# Altium PCB Pump_Agri.PcbDoc (part 1 of 2)
Units mm, origin at the board's own origin, x right, y up, seen from the top; angles counter-clockwise.
Board outline 92.13 x 124.56 mm, 2 copper layers (Top Layer, Bottom Layer); 134 components, 82 nets, 406 pads, 376 vias.
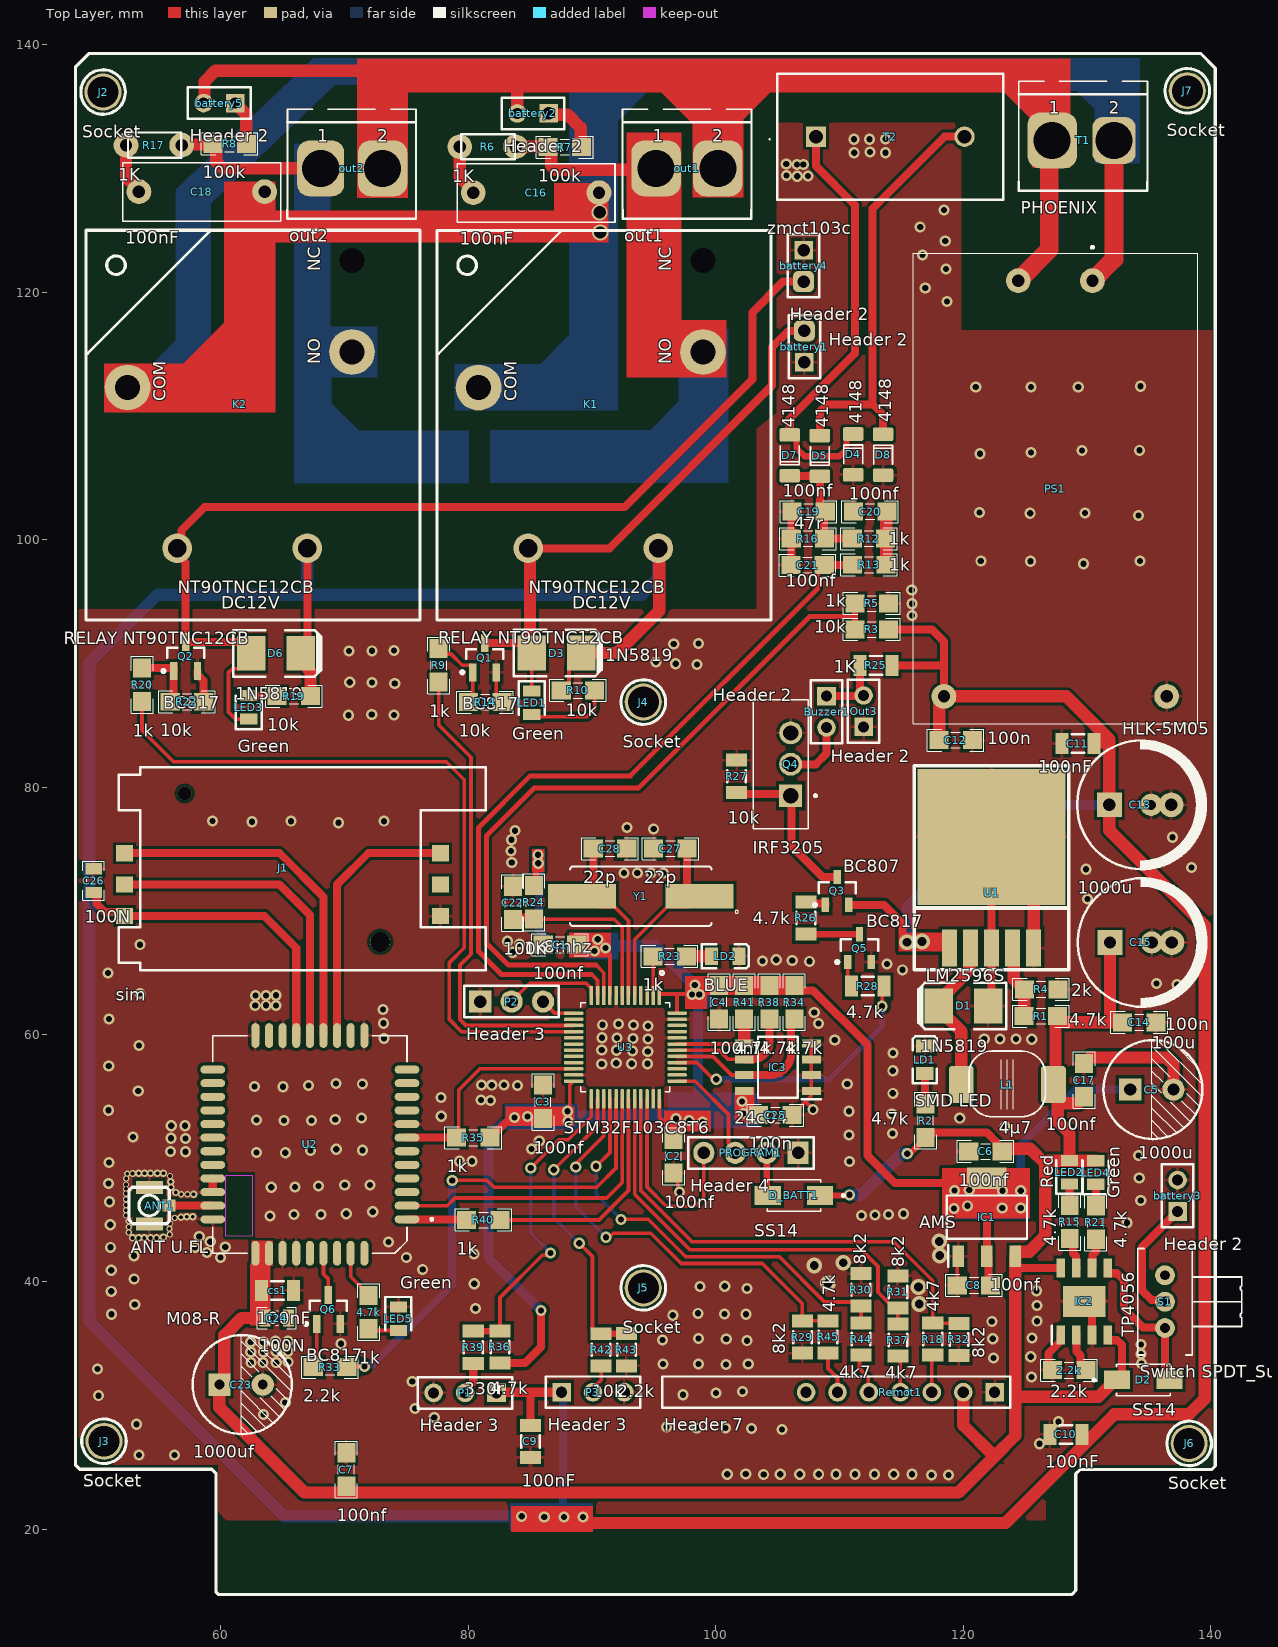
[diagram p0: Top Layer view]
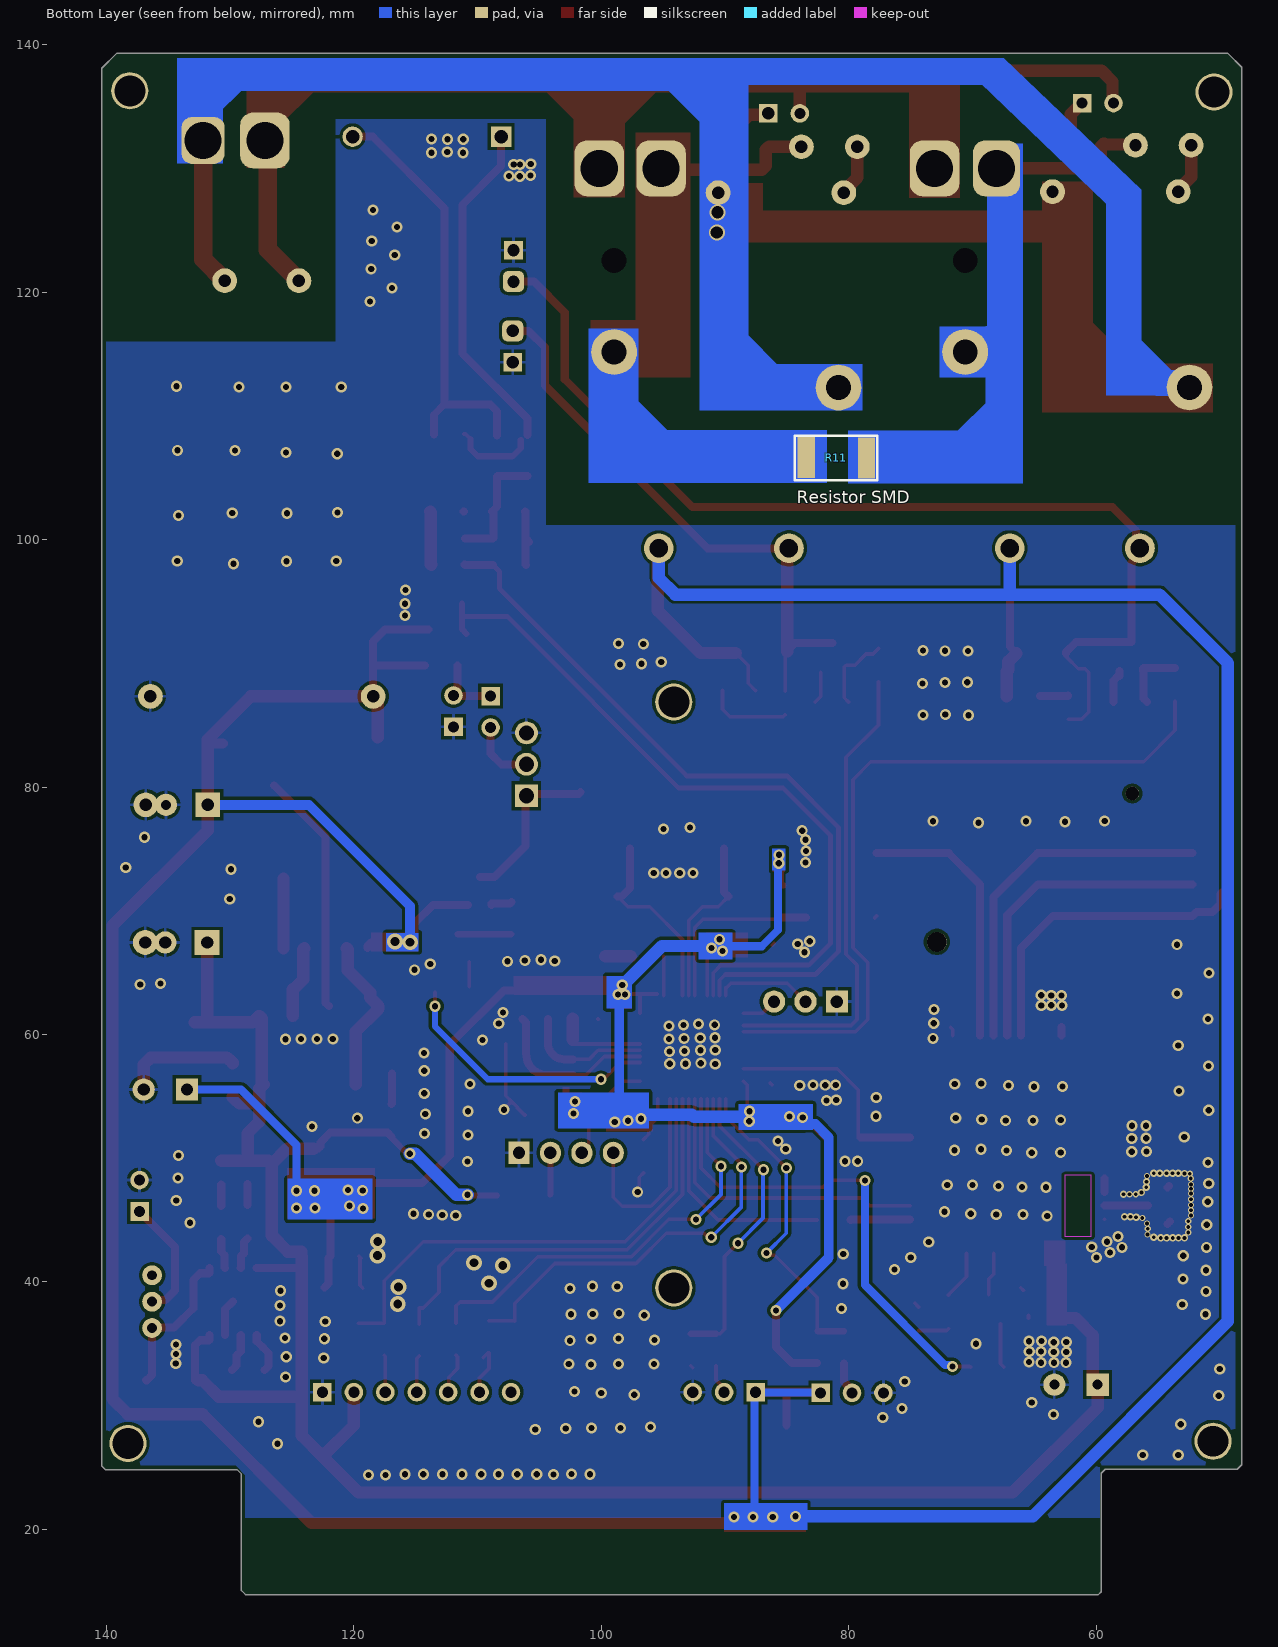
[diagram p1: Bottom Layer view, seen from below]
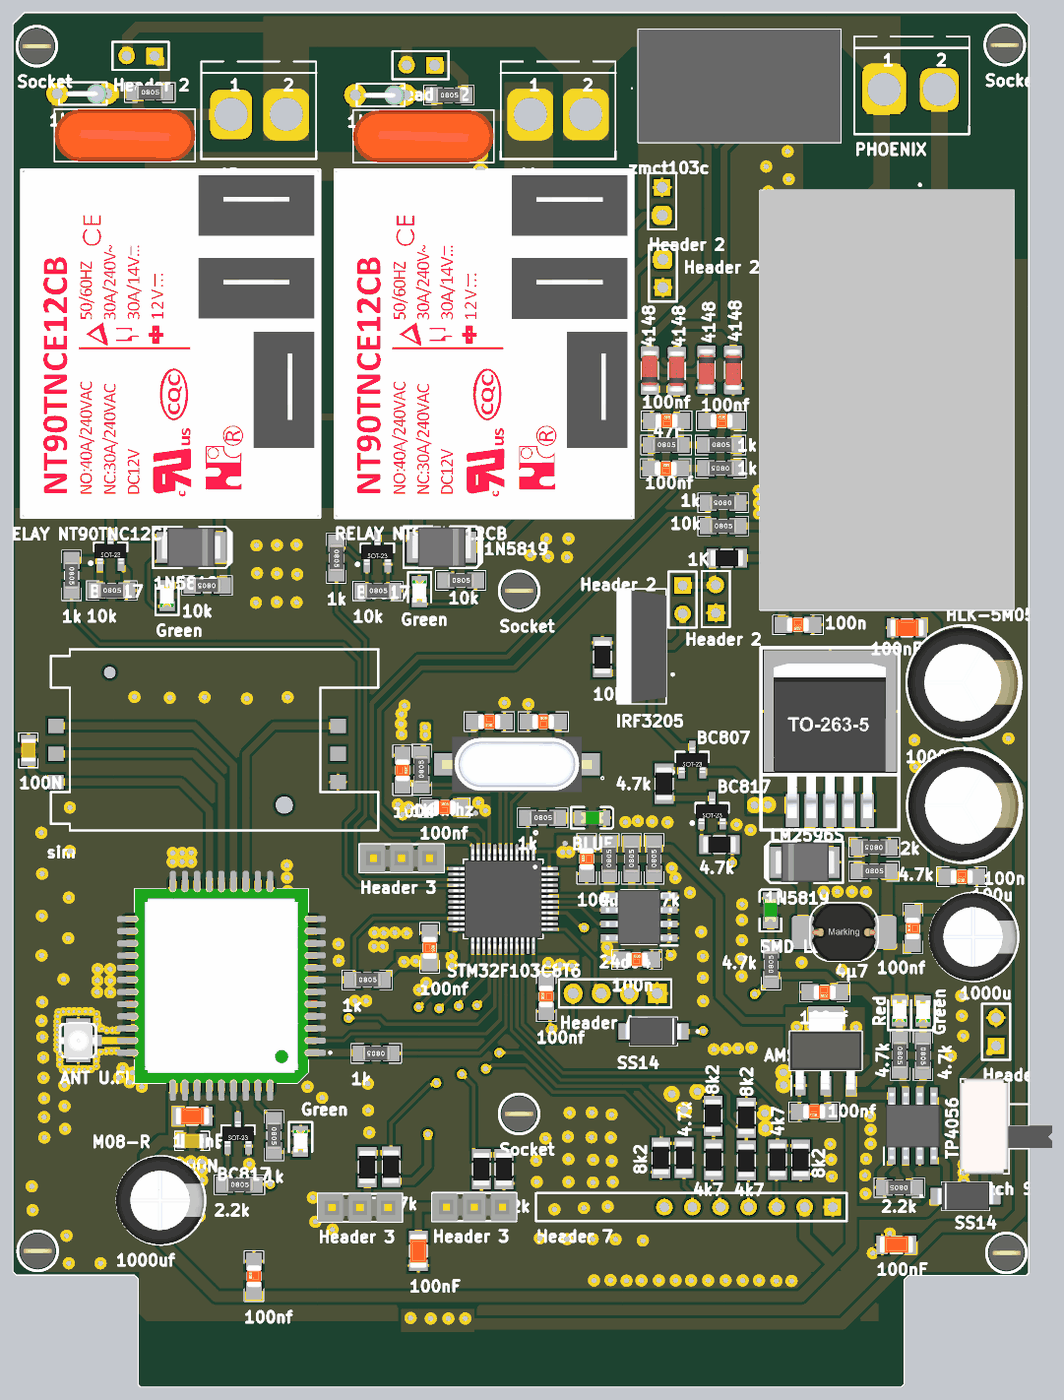
[diagram p3: 3D render of the assembled board from above, using the file's embedded part models]

## Layer stack, top to bottom
Top Solder: solder mask 0.0102, Solder Resist, Dk 3.5
Top Layer: signal copper 0.0356
Dielectric 1: dielectric 0.32, FR-4, Dk 4.8
Bottom Layer: signal copper 0.0356
Bottom Solder: solder mask 0.0102, Solder Resist, Dk 3.5

## Board outline
59.588,14.961 59.817,14.732 128.753,14.732 129.083,15.062 129.083,24.486 129.438,24.841 140.081,24.841 140.36,25.121 140.36,138.1 139.167,139.294 49.352,139.294 48.235,138.176 48.235,25.222 48.59,24.867 59.258,24.867 59.588,24.536

## Design rules (kind name [scope] priority, off if disabled: settings)
Clearance [All] p1: gap=0.25 ignorepadtopadclearanceinfootprint=FALSE
PolygonConnect [All] p1: thpad.connectstyle=Relief thpad.reliefconductorwidth=0.254 thpad.reliefentries=4 thpad.polygonreliefangle="90 Angle" thpad.airgapwidth=0.254 smdpad.connectstyle=Relief smdpad.reliefconductorwidth=0.254 smdpad.reliefentries=4 smdpad.polygonreliefangle="90 Angle" smdpad.airgapwidth=0.254 via.connectstyle=Direct via.reliefconductorwidth=0.254 via.reliefentries=4 via.polygonreliefangle="90 Angle" via.airgapwidth=0.254
RoutingVias [All] p1: holewidth=0.711 width=1.27 viastyle="Through Hole" minholewidth=0.711 minwidth=1.27 maxholewidth=0.711 maxwidth=1.27
SolderMaskExpansion [All] p1: expansion=0.102 istentingtop=FALSE
SupplyNets "Schematic Supply Nets_1" [InNet('5v')] p1: voltage=0.000
SupplyNets "Schematic Supply Nets" [InNet('GND')] p2: voltage=0.000
Width [All] p1: maxlimit=1.5 minlimit=0.3 preferedwidth=0.65
30 further rules are at their usual default settings.

## Components (designator, comment, footprint, x,y, rotation, side; value= is the part's Value field where it differs from the comment)
2.2k "2.2k" RESC3413X04N 128.553,32.868 r180 top
4.7k "1k" RESC3413X04N 71.933,37.567 r270 top
ANT1 "ANT U.FL" "U.FL SMD" 55.016,46.177 r90 top
battery1 "Header 2" HDR1X2#1 107.15,114.325 r90 top
battery2 "Header 2" HDR1X2#2 86.487,134.442 r180 top
battery3 "Header 2" HDR1X2#3 137.312,45.695 r90 top
battery4 "Header 2" HDR1X2#1 107.086,123.393 r270 top
battery5 "Header 2" HDR1X2#3 61.138,135.28 r180 top
Buzzer1 "Header 2" HDR1X2#3 108.941,87.351 r270 top
C1 "100nf" CAPC3413X12N 87.401,67.259 r0 top
C2 "100nf" CAPC3413X12N 96.585,50.158 r90 top
C3 "100nf" CAPC3413X12N 86.03,54.559 r270 top
C4 "100nf" CAPC3413X12N 100.254,62.611 r90 top
C5 "1000u" "Cap electrolitic radial 8x12-3.5"#1 135.23,55.55 r0 top value=1uF
C6 "100nf" CAPC3413X12N 121.793,50.546 r180 top
C7 "100nf" CAPC3413X12N 70.129,24.841 r90 top
C8 "100nf" CAPC3413X12N 120.853,39.726 r180 top
C9 "100nF" SMD_CAP_1206 85.014,28.417 r270 top
C10 "100nF" SMD_CAP_1206 129.591,27.686 r180 top
C11 "100nF" SMD_CAP_1206 130.556,83.515 r180 top
C12 "100n" CAPC3413X12N 119.38,83.795 r180 top
C13 "1000u" "Cap electrolitic radial 10x20-5"#1 134.304,78.562 r0 top
C14 "100n" CAPC3413X12N 134.214,60.985 r180 top
C15 "100u" "Cap electrolitic radial 10x20-5"#2 134.355,67.437 r0 top
C16 "100nF" Cap-10nF-630V 80.391,128.041 r0 top
C17 "100nf" CAPC3413X12N 129.769,56.316 r90 top
C18 "100nF" Cap-10nF-630V 53.365,128.118 r0 top
C19 "100nf" CAPC3413X12N 107.489,102.26 r0 top
C20 "100nf" CAPC3413X12N 112.467,102.26 r0 top
C21 "100nf" CAPC3413X12N 107.413,97.942 r0 top
C22 "100n" CAPC3413X12N 83.591,70.637 r270 top
C23 "1000uf" "Cap electrolitic radial 8x12-3.5"#2 61.623,31.699 r0 top value=1uF
C24 "100N" CAP0805 64.516,37.084 r0 top value=100nF
C25 "100n" CAPC3413X12N 104.8,53.492 r0 top
C26 "100N" CAP0805 49.708,72.441 r90 top value=100nF
C27 "22p" CAPC3413X12N 96.317,75.032 r0 top
C28 "22p" CAPC3413X12N 91.44,75.032 r180 top
cs1 "100nF" SMD_CAP_1206 65.867,39.319 r180 top
D1 "1N5819" DO-214AA(SMA) 120.015,62.306 r90 top
D2 "SS14" DIOM4325X250N 134.544,32.08 r0 top
D3 "1N5819" DO-214AA(SMA) 87.122,90.83 r270 top
D4 "4148" "SOD80, LL-34" 111.1,106.883 r270 top
D5 "4148" "SOD80, LL-34" 108.407,106.756 r90 top
D6 "1N5819" DO-214AA(SMA) 64.44,90.805 r270 top
D7 "4148" "SOD80, LL-34" 105.969,106.807 r90 top
D8 "4148" "SOD80, LL-34" 113.513,106.858 r270 top
D_BATT1 "SS14" DIOM4325X250N 106.299,46.99 r180 top
IC1 "AMS" SOT230P700X180-4N 121.895,45.237 r90 top
IC2 "TP4056" SOIC127P600X175-9N 129.769,38.43 r90 top
IC3 "24c04" SOIC127P600X175-8N 105.004,57.353 r180 top
J1 "sim" GCT_SIM5060-6-0-26-01-X_REVC 64.973,73.381 r90 top
J2 "Socket" "Test Point" 50.47,136.169 r0 top
J3 "Socket" "Test Point" 50.546,27.127 r0 top
J4 "Socket" "Test Point" 94.132,86.868 r0 top
J5 "Socket" "Test Point" 94.132,39.522 r0 top
J6 "Socket" "Test Point" 138.252,26.949 r0 top
J7 "Socket" "Test Point" 138.1,136.271 r0 top
K1 "RELAY NT90TNC12CB" "RELAY NT90TNC12CB" 89.891,110.922 r0 top
K2 "RELAY NT90TNC12CB" "RELAY NT90TNC12CB" 61.519,110.929 r0 top
L1 "4µ7" "Inductor SMD 3x3.2mm" 123.546,55.956 r0 top
LD1 "SMD LED" "LED_0805 G" 116.891,57.963 r90 top
LD2 "BLUE" "LED_0805 G" 100.762,66.319 r0 top
LED1 "Green" LEDC2012X80N 85.115,86.802 r270 top
LED2 "Red" LEDC2012X80N 128.575,48.87 r90 top
LED3 "Green" LEDC2012X80N 62.255,86.436 r90 top
LED4 "Green" LEDC2012X80N 130.708,48.844 r90 top
LED5 "Green" LEDC2012X80N 74.346,37.033 r270 top
out1 "out1" "MSTBV 2,5/2-G-5"#1 97.663,129.997 r0 top
out2 "out2" "MSTBV 2,5/2-G-5"#2 70.561,129.997 r0 top
Out3 "Header 2" HDR1X2#3 111.938,84.861 r90 top
P1 "Header 3" HDR1X3#1 82.269,31.039 r180 top
P2 "Header 3" HDR1X3#2 80.95,62.662 r0 top
P3 "Header 3" HDR1X3#1 87.527,31.09 r0 top
PROGRAM1 "Header 4" HDR1X4 106.644,50.438 r180 top
PS1 "HLK-5M05" HLK5M05 130.434,120.925 r270 top
Q1 "BC817" SOT-23 81.305,90.449 r0 top
Q2 "BC817" SOT-23 57.15,90.551 r0 top
Q3 "BC807" SOT23_BEC_N 109.804,71.603 r90 top
Q4 "IRF3205" TO254P1041X444X2933-3 106.045,79.299 r90 top
Q5 "BC817" SOT23_BEC_N 111.608,66.98 r90 top
Q6 "BC817" SOT-23 68.682,37.789 r0 top
R1 "4.7k" RESC3413X04N 126.263,61.493 r0 top
R2 "4.7k" RESC3413X04N 116.942,53.035 r90 top
R3 "10k" RESC3413X04N 112.598,92.735 r0 top
R4 "2k" RESC3413X04N 126.289,63.652 r180 top
R5 "1k" RESC3413X04N 112.598,94.844 r180 top
R6 "1K" Res-(1/4)-Stand#1 82.855,131.75 r180 top
R7 "100k" RESC3413X04N 87.782,131.724 r0 top
R8 "100k" RESC3413X04N 60.706,131.978 r0 top
R9 "1k" RESC3413X04N 77.597,89.84 r270 top
R10 "10k" RESC3413X04N 88.849,87.808 r0 top
R11 "Resistor SMD" "2512 Resistor" 81.001,106.604 r0 bottom
R12 "1k" RESC3413X04N 112.37,100.076 r0 top
R13 "1k" RESC3413X04N 112.391,97.968 r180 top
R14 "10k" RESC3413X04N 81.356,86.868 r0 top
R15 "4.7k" RESC3413X04N 128.6,44.856 r270 top
R16 "47r" RESC3413X04N 107.438,100.076 r0 top
R17 "1K" Res-(1/4)-Stand#2 55.905,131.877 r180 top
R18 "4k7" SMD_RES_1206 117.526,34.082 r90 top
R19 "10k" RESC3413X04N 65.888,87.351 r180 top
R20 "1k" RESC3413X04N 53.619,88.265 r270 top
R21 "4.7k" RESC3413X04N 130.708,44.806 r270 top
R22 "10k" RESC3413X04N 57.252,86.893 r0 top
R23 "1k" RESC3413X04N 96.266,66.319 r0 top
R24 "1K" RESC3413X04N 85.293,70.688 r90 top
R25 "1K" "RES 1206 (3216X08L)" 114.229,89.84 r180 top
R26 "4.7k" "RES 1206 (3216X08L)" 107.264,68.118 r90 top value=1K
R27 "10k" "RES 1206 (3216X08L)" 101.676,79.578 r90 top value=1K
R28 "4.7k" "RES 1206 (3216X08L)" 113.569,63.906 r180 top value=1K
R29 "8k2" SMD_RES_1206 106.985,36.835 r270 top
R30 "8k2" SMD_RES_1206 111.709,38.069 r90 top
R31 "8k2" SMD_RES_1206 114.706,37.892 r90 top
R32 "8k2" SMD_RES_1206 119.634,36.657 r270 top
R33 "2.2k" RESC3413X04N 68.809,33.122 r0 top
R34 "4.7k" RESC3413X04N 106.35,62.611 r90 top
R35 "1k" RESC3413X04N 80.391,51.664 r0 top
R36 "4.7k" SMD_RES_1206 82.548,36.043 r270 top value=1K
R37 "4k7" SMD_RES_1206 114.706,34.011 r90 top
R38 "4.7k" RESC3413X04N 104.318,62.611 r90 top
R39 "330r" SMD_RES_1206 80.389,36.022 r270 top value=1K
R40 "1k" RESC3413X04N 81.204,45.009 r180 top
R41 "4.7k" RESC3413X04N 102.286,62.611 r90 top
R42 "10k" SMD_RES_1206 90.727,35.814 r270 top value=1K
R43 "2.2k" SMD_RES_1206 92.759,35.819 r270 top value=1K
R44 "4k7" SMD_RES_1206 111.735,34.087 r90 top
R45 "4.7k" SMD_RES_1206 109.068,34.259 r90 top
Remot1 "Header 7" HDR1X7 122.53,31.09 r180 top
S1 "Switch SPDT_Subminiator" "SPDT Subminiator" 136.296,38.405 r270 top
T1 "PHOENIX" "MSTBV 2,5/2-G-5"#3 129.678,132.258 r0 top
T2 "zmct103c" zmct103c 108.091,132.563 r0 top
U1 "LM2596S" "TO - 263" 122.276,71.476 r0 top
U2 "M08-R" XCVR_M08-R 67.184,51.114 r180 top
U3 "STM32F103C8T6" QFP50P900X900X160-48N 92.685,58.979 r270 top
Y1 "8mhz" XTAL1170X500X450 93.929,71.171 r180 top

## Footprints (in the part's own frame and the unit in brackets; to place one, negate y for a bottom-side part, rotate by r counter-clockwise, add the part's x,y. Pads: shape width x height; smd on the part's side, far side on the other; paste and mask are expansions set on the pad)
"2512 Resistor" [mil]
  rect 55x129.92 smd: 1(-96,0) 2(96,-1)
  silkscreen extent -131,-71 132,71, body extent -126,-63 126,63, height 24
CAP0805 [mm] "Chip Capacitor, 2-Leads, Body 2/00x1/25mm, IPC Medium Density DESIGNER:ABBAS BASEREH"
  rect 0.9x1.35 smd: 1(-0.95,0) 2(0.95,0)
  silkscreen extent -1.58,-0.87 1.58,0.87, body extent -1.02,-0.65 1.02,0.65, height 0.5
"Cap electrolitic radial 8x12-3.5"#1 [mm] "Cap electrolitic radial 8x12-3.5-Design:Abbas Basereh"
  rect 1.8x1.8 hole 1: 1(-1.75,0)
  round 1.8 hole 1: 2(1.75,0)
  silkscreen extent -3.9,-4 4.1,4, body extent -4,-4 4,4, height 12.3
"Cap electrolitic radial 8x12-3.5"#2 [mm] "Cap electrolitic radial 8x12-3.5-Design:Abbas Basereh"
  rect 1.8x1.8 hole 0.8: 1(-1.75,0)
  round 1.8 hole 0.8: 2(1.75,0)
  silkscreen extent -3.9,-4 4.1,4, body extent -4,-4 4,4, height 12.3
"Cap electrolitic radial 10x20-5"#1 [mm] "Cap electrolitic radial 10x20-5-Design:Abbas Basereh"
  rect 2x2 hole 1: 1(-2.5,0)
  round 1.8 hole 0.8: 2(0.875,0)
  round 2 hole 1: 2(2.5,0)
  silkscreen extent -5.1,-5.2 5.3,5.2, body extent -5,-5 5,5, height 20
"Cap electrolitic radial 10x20-5"#2 [mm] "Cap electrolitic radial 10x20-5-Design:Abbas Basereh"
  rect 2x2 hole 1: 1(-2.5,0)
  round 1.8 hole 1: 2(0.875,0)
  round 2 hole 1: 2(2.5,0)
  silkscreen extent -5.1,-5.2 5.3,5.2, body extent -5,-5 5,5, height 20
Cap-10nF-630V [mm] "Bipolar Capacitor-Design:Ali Hafizi"
  round 2 hole 1: 1(0,0) 2(10.16,0)
  silkscreen extent -1.29,-2.4 11.46,2.35, body extent -1.29,-2.4 11.46,2.35, height 12.19
CAPC3413X12N [mm] "Chip Capacitor, 2-Leads, Body 3/40x1/30mm, IPC Medium Density-Design:Abbas Basereh"
  rect 1.55x1.45 smd: 1(-1.35,0) 2(1.35,0)
  silkscreen extent -2.29,-0.89 2.29,0.89, body extent -1,-0.62 1,0.63, height 0.78
DIOM4325X250N [mm]
  rect 2.12x1.5 smd: A(2.115,0) C(-2.115,0)
  silkscreen extent -4.1,-1.28 2.16,1.28, body extent -2.57,-1.28 2.57,1.28, height 2.5
DO-214AA(SMA) [mm]
  rect 2.8x2.3 smd: 1(0,-2.003) 2(0,2.003)
  silkscreen extent -1.87,-3.45 1.88,3.65, body extent -1.8,-2.7 1.8,2.7, height 2.3
GCT_SIM5060-6-0-26-01-X_REVC [mm]
  rect 1.3x1.4 smd: C1(-3.81,12.77) C2(-1.27,12.77) C3(1.27,12.77) C5(-3.81,-12.77) C6(-1.27,-12.77) C7(1.27,-12.77)
  round 1.6 hole 1.6 unplated: ""(-5.9,-7.9)
  round 1.1 hole 1.1 unplated: ""(6.1,7.9)
  silkscreen extent -8.2,-16.42 8.2,13.23
HDR1X2#1 [mm] "Connector; Header; 2 Position"
  rect 1.5x1.5 hole 1: 1(0,0)
  rrect50% 1.7x1.7 hole 1: 2(2.54,0)
  silkscreen extent -1.27,-1.27 3.81,1.27
HDR1X2#2 [mm] "Connector; Header; 2 Position"
  rect 1.5x1.5 hole 1: 1(0,0)
  round 1.5 hole 0.9: 2(2.54,0)
  silkscreen extent -1.27,-1.27 3.81,1.27
HDR1X2#3 [mm] "Connector; Header; 2 Position"
  rect 1.5x1.5 hole 0.9: 1(0,0)
  round 1.5 hole 0.9: 2(2.54,0)
  silkscreen extent -1.27,-1.27 3.81,1.27
HDR1X3#1 [mm] "Connector; Header; 3 Position"
  rect 1.5x1.5 hole 0.9: 1(0,0)
  round 1.5 hole 0.9: 2(2.54,0) 3(5.08,0)
  silkscreen extent -1.27,-1.27 6.35,1.27, body extent -1.26,-1.27 6.36,1.27, height 8.38
HDR1X3#2 [mm] "Connector; Header; 3 Position"
  rect 1.8x1.8 hole 1: 1(0,0)
  round 1.8 hole 1: 2(2.54,0) 3(5.08,0)
  silkscreen extent -1.27,-1.27 6.35,1.27, body extent -1.26,-1.27 6.36,1.27, height 8.38
HDR1X4 [mm] "Connector; Header; 4 Position"
  rect 1.7x1.8 hole 1: 1(0,0)
  oval 1.7x1.8 hole 1: 2(2.54,0) 3(5.08,0) 4(7.62,0)
  silkscreen extent -1.27,-1.27 8.89,1.27
HDR1X7 [mm] "Connector; Header; 7 Position"
  rect 1.5x1.5 hole 0.9: 1(0,0)
  round 1.5 hole 0.9: 2(2.54,0) 3(5.08,0) 4(7.62,0) 5(10.16,0) 6(12.7,0) 7(15.24,0)
  silkscreen extent -1.27,-1.27 26.87,1.27
HLK5M05 [mm]
  round 2 hole 1: 1(0,0) 2(0,-6) 3(33.6,6) 4(33.6,-12)
  silkscreen extent -2.8,-14.5 35.8,8.5, body extent -2.23,-14.5 35.77,8.5, height 18.13
"Inductor SMD 3x3.2mm" [mm] "Inductor 4.7µH SMD 3x3.2mm"
  round 0.508 on Mech15: 0(0,0)
  rrect25% 2x3 smd: 1(-3.708,0) 2(3.734,0)
  silkscreen extent -3.1,-2.6 3.1,2.7, body extent -2.9,-2.6 2.89,2.6, height 4.5
"LED_0805 G" [mm]
  rect 1.05x1.4 smd: 1(-1.1,0) 2(1.1,0)
  silkscreen extent -1.91,-0.97 1.89,0.98, body extent -1,-0.62 1.02,0.63, height 1.1
LEDC2012X80N [mm]
  rect 0.9x1.4 smd: 1(-0.95,0) 2(0.95,0)
  silkscreen extent -1.75,-1.05 0.95,1.05, body extent -1.03,-0.63 0.97,0.63, height 0.7
"MSTBV 2,5/2-G-5"#1 [mm] "Header, Nominal current: 12 A Rated voltage (III/2): 320 V Number of positions: 2 Pitch: 5mm Color: green Contact surface: Tin Assembly: Soldering DESIGNER:ABBAS BASEREH"
  rrect50% 4x4.5 hole 3: 1(-2.5,0) 2(2.5,0)
  silkscreen extent -5.2,-4.05 5.2,4.78, body extent -5,-3.85 5,4.75, height 12.03
"MSTBV 2,5/2-G-5"#2 [mm] "Header, Nominal current: 12 A Rated voltage (III/2): 320 V Number of positions: 2 Pitch: 5mm Color: green Contact surface: Tin Assembly: Soldering DESIGNER:ABBAS BASEREH"
  rrect50% 3.8x4.5 hole 3: 1(-2.5,0)
  rrect50% 4x4.5 hole 3: 2(2.5,0)
  silkscreen extent -5.2,-4.05 5.2,4.78, body extent -5,-3.85 5,4.75, height 12.03
"MSTBV 2,5/2-G-5"#3 [mm] "Header, Nominal current: 12 A Rated voltage (III/2): 320 V Number of positions: 2 Pitch: 5mm Color: green Contact surface: Tin Assembly: Soldering DESIGNER:ABBAS BASEREH"
  rrect50% 4x4.5 hole 3: 1(-2.5,0)
  rrect50% 3.5x3.81 hole 3: 2(2.5,0)
  silkscreen extent -5.2,-4.05 5.2,4.78, body extent -5,-3.85 5,4.75, height 12.03
QFP50P900X900X160-48N [mm]
  rrect50% 1.56x0.28 smd: 1(-4.18,2.75) 2(-4.18,2.25) 3(-4.18,1.75) 4(-4.18,1.25) 5(-4.18,0.75) 6(-4.18,0.25) 7(-4.18,-0.25) 8(-4.18,-0.75) 9(-4.18,-1.25) 10(-4.18,-1.75) 11(-4.18,-2.25) 12(-4.18,-2.75) 25(4.18,-2.75) 26(4.18,-2.25) 27(4.18,-1.75) 28(4.18,-1.25) 29(4.18,-0.75) 30(4.18,-0.25) 31(4.18,0.25) 32(4.18,0.75) 33(4.18,1.25) 34(4.18,1.75) 35(4.18,2.25) 36(4.18,2.75)
  rrect50% 0.28x1.56 smd: 13(-2.75,-4.18) 14(-2.25,-4.18) 15(-1.75,-4.18) 16(-1.25,-4.18) 17(-0.75,-4.18) 18(-0.25,-4.18) 19(0.25,-4.18) 20(0.75,-4.18) 21(1.25,-4.18) 22(1.75,-4.18) 23(2.25,-4.18) 24(2.75,-4.18) 37(2.75,4.18) 38(2.25,4.18) 39(1.75,4.18) 40(1.25,4.18) 41(0.75,4.18) 42(0.25,4.18) 43(-0.25,4.18) 44(-0.75,4.18) 45(-1.25,4.18) 46(-1.75,4.18) 47(-2.25,4.18) 48(-2.75,4.18)
  silkscreen extent -6.15,-3.6 3.6,3.6, body extent -4.5,-4.5 4.5,4.5, height 1.6
"RELAY NT90TNC12CB" [mm] "31.7x26.7x28 DESIGNER:ABBAS BASEREH"
  round 3.7 hole 2: 1(-9.068,1.365) 4(9.068,4.235)
  round 2.4 hole 1.5: 2(-5.062,-11.626) 3(5.46,-11.626)
  round 1 hole 2: 5(9.068,11.626)
  silkscreen extent -12.43,-17.43 14.57,14.07, body extent -12.42,-17.42 14.57,14.07, height 27.76
"RES 1206 (3216X08L)" [mm] "Chip Resistor, 2-Leads, Body 3.2x1.6mm, IPC High Density _ (0.125 W)"
  rect 1.05x1.7 smd: 1(0,0) 2(2.596,0)
  silkscreen extent 0.8,-0.75 1.8,0.75, body extent -0.23,-0.76 2.82,0.76, height 0.6
Res-(1/4)-Stand#1 [mm]
  round 2 hole 1: 1(-0.965,0) 2(3.556,0)
  silkscreen extent -0.89,-1.02 3.43,1.02, body extent -0.89,-0.9 2.82,0.94, height 7.3
Res-(1/4)-Stand#2 [mm]
  round 2 hole 1: 1(-0.914,0) 2(3.581,0)
  silkscreen extent -0.89,-1.02 3.43,1.02, body extent -0.89,-0.9 2.82,0.94, height 7.3
RESC3413X04N [mm] "Chip Resistor, 2-Leads, Body 3/40x1/30mm, IPC Medium Density-Design:Abbas Basereh"
  rect 1.55x1.45 smd: 1(-1.35,0) 2(1.35,0)
  silkscreen extent -2.29,-0.89 2.29,0.89, body extent -1.25,-0.62 1.25,0.62, height 0.79
SMD_CAP_1206 [mm]
  rect 1.05x1.7 smd: 1(0,0) 2(2.596,0)
  silkscreen extent 0.8,-0.75 1.8,0.75, body extent -0.22,-0.77 2.82,0.75, height 0.75
SMD_RES_1206 [mm] "Chip Resistor, 2-Leads, Body 3.2x1.6mm, IPC High Density _ (0.125 W)"
  rect 1.05x1.7 smd: 1(0,0) 2(2.596,0)
  silkscreen extent 0.8,-0.75 1.8,0.75, body extent -0.23,-0.76 2.82,0.76, height 0.6
"SOD80, LL-34" [mm] "Diode, MiniMELF"
  round 0.5 on Mech15: 0(0,0)
  rrect25% 1.1x1.65 smd: 1(1.65,0) 2(-1.65,0)
  silkscreen extent -0.76,-0.76 0.76,0.76, body extent -1.88,-0.8 1.82,0.8, height 1.6
SOIC127P600X175-8N [mm]
  rect 1.525x0.65 smd: 1(-2.712,1.905) 2(-2.712,0.635) 3(-2.712,-0.635) 4(-2.712,-1.905) 5(2.712,-1.905) 6(2.712,-0.635) 7(2.712,0.635) 8(2.712,1.905)
  silkscreen extent -3.47,-2.45 1.6,2.58, body extent -3,-2.45 3,2.45, height 1.75
SOIC127P600X175-9N [mm]
  rect 1.525x0.7 smd: 1(-2.712,1.905) 2(-2.712,0.635) 3(-2.712,-0.635) 4(-2.712,-1.905) 5(2.712,-1.905) 6(2.712,-0.635) 7(2.712,0.635) 8(2.712,1.905)
  rect 2.513x3.402 smd: 9(0,0)
  silkscreen extent -3.47,2.61 -1.95,2.61, body extent -3,-2.45 3,2.45, height 1.75
SOT23_BEC_N [mm] "SOT23, 3-Leads, Body 2.9x1.3mm, Pitch 0.95mm, Lead Span 2.4mm, IPC Medium Density"
  rect 1.15x0.6 smd: 1(-1.125,0.95) 2(-1.125,-0.95) 3(1.125,0)
  silkscreen extent -1.25,-1.5 0.7,1.92, body extent -1.23,-1.45 1.07,1.45, height 1
SOT230P700X180-4N [mm]
  rect 1.75x0.95 smd: 1(-3.15,2.3) 2(-3.15,0) 3(-3.15,-2.3)
  rect 1.75x3.2 smd: 4(3.15,0)
  silkscreen extent -4.03,-3.25 1.75,3.25, body extent -3.5,-3.25 3.5,3.25, height 1.68
SOT-23 [mm]
  rect 0.6x1.45 smd: 1(-0.95,-1.175) 2(0.95,-1.175) 3(0,1.175)
  silkscreen extent -1.92,-1.3 1.5,0.7, body extent -1.45,-1.23 1.45,1.07, height 1
"SPDT Subminiator" [mm] "Subminiator SPDT switch"
  round 1.6 hole 0.8: 1(2.127,0) 2(0,0) 3(-2.14,0)
  silkscreen extent -4.3,-2.2 4.3,6.2, body extent -4.31,-2.28 4.3,6.09, height 4.7
"Test Point" [mm]
  round 3 hole 2.5: 1(0,0)
  silkscreen extent -1.8,-1.8 1.8,1.8, body extent -1.59,-1.58 1.59,1.59, height 5.65
TO254P1041X444X2933-3 [mm]
  rect 1.85x1.85 / inner round 1.85 / far side rect 1.85x1.85 hole 1.23: 1(0,0)
  round 1.85 hole 1.23: 2(2.54,0) 3(5.08,0)
  silkscreen extent -2.67,-2.1 7.75,3.03, body extent -2.67,-1.41 7.75,3.03, height 19.3
"TO - 263" [mm]
  rect 1.2x3 smd: 1(-3.4,-4.5) 2(-1.7,-4.5) 3(0,-4.5) 4(1.7,-4.5) 5(3.4,-4.5)
  rect 12x11 smd: 3(0,4.5)
  silkscreen extent -6.25,-6.25 6.25,10.25, body extent -5.08,-5.2 5.08,8.81, height 4.56
"U.FL SMD" [mm] "U.FL Antenna-Design:Ali Hafizi"
  rect 1x1.05 smd: 1(0.002,-0.8)
  rect 1.05x2.2 smd: 2(-1.475,0.8) 2(1.475,0.8)
  silkscreen extent -1.47,-0.8 1.47,2.44, body extent -1.73,-0.76 1.67,2.34, height 1.25
XCVR_M08-R [mm]
  oval 2x0.65 smd paste-2: 1(-7.85,6.05) 2(-7.85,4.95) 3(-7.85,3.85) 4(-7.85,2.75) 5(-7.85,1.65) 6(-7.85,0.55) 7(-7.85,-0.55) 8(-7.85,-1.65) 9(-7.85,-2.75) 10(-7.85,-3.85) 11(-7.85,-4.95) 12(-7.85,-6.05) 22(7.85,-6.05) 23(7.85,-4.95) 24(7.85,-3.85) 25(7.85,-2.75) 26(7.85,-1.65) 27(7.85,-0.55) 28(7.85,0.55) 29(7.85,1.65) 30(7.85,2.75) 31(7.85,3.85) 32(7.85,4.95) 33(7.85,6.05)
  oval 0.65x2 smd paste-2: 13(-4.4,-8.8) 14(-3.3,-8.8) 15(-2.2,-8.8) 16(-1.1,-8.8) 17(0,-8.8) 18(1.1,-8.8) 19(2.2,-8.8) 20(3.3,-8.8) 21(4.4,-8.8) 34(4.4,8.8) 35(3.3,8.8) 36(2.2,8.8) 37(1.1,8.8) 38(0,8.8) 39(-1.1,8.8) 40(-2.2,8.8) 41(-3.3,8.8) 42(-4.4,8.8)
  Keep-Out Layer region: 6.8,2.48 4.65,2.48 4.65,7.43 6.8,7.43
  silkscreen extent -9.95,-8.8 7.85,8.8, body extent -7.85,-8.8 7.85,8.8, height 2.6
XTAL1170X500X450 [mm]
  rect 5.5x2 smd: 1(-4.75,0) 2(4.75,0)
  silkscreen extent -7.88,-2.41 5.71,2.41, body extent -6.75,-2.5 6.75,2.5, height 4.5
zmct103c [mm]
  rect 1.65x1.65 hole 1.1: 1(0,0)
  round 1.65 hole 1.1: 2(12,0)
  silkscreen extent -3.8,-5.1 15.15,5.08, body extent -3.15,-5.1 15.15,5.1, height 19.3

## Part data
2.2k 4.7k R1 R2 R3 R4 R5 R7 R8 R9 R10 R12 R13 R14 R15 R16 R19 R20 R21 R22 R23 R24 R33 R34 R35 R38 R40 R41: library part "RES 0805 0.125W", "RES 0805", Data=16-12-2016, Desc.="RES SMD 0805", Designer="Abbas Basereh"
ANT1: "Antenna", Ali Hafizi="Ali Hafizi"
battery1 battery2 battery3 battery4 battery5 Buzzer1 Out3: "Header, 2-Pin", LatestRevisionDate=17-Jul-2002, LatestRevisionNote="Re-released for DXP Platform.", Publisher="Altium Limited"
C1 C2 C3 C4 C6 C7 C8 C12 C14 C17 C19 C20 C21 C22 C25 C27 C28: library part "CAP SMD 0805", "CAP 0805", Data=16-12-2016, Desc.="CAP SMD 0805", Designer="Abbas Basereh"
C5 C23: library part "Cap ELECTROLITIC TOTAL SIZE", "Cap electrolitic radial", Data=16-12-2016, Designer="Abbas Basereh"
C9 C10 C11 C24 C26 cs1: library part Cap-Bipolar, "Bipolar Capacitor", Voltage=100V, Adding Date=1387/12/20, Designer="Saeid Jorablo", Organazation=ControTec
C13 C15: library part "Cap electrolitic radial 10x21", "Cap electrolitic radial", Data=16-12-2016, Designer="Abbas Basereh", Part. No=100U/50V
C16 C18: library part "CAP CERAMIC TOTAL SIZE", "CAP Ceramic Total", Designer="Ali Hafizi"
D1 D3 D6: library part 1N5819(SS14)
D2: "1A, 40V, Schottky Rectifier", Package="SMA-2 Taiwan Semiconductor", Check_prices=https://www.snapeda.com/parts/SS14/taiwan/view-part/?ref=eda, MF="Taiwan Semiconductor", MP=SS14, SnapEDA_Link=https://www.snapeda.com/parts/SS14/taiwan/view-part/?ref=snap
D4 D5 D7 D8: library part 1N4148UR-1, "DIODE GEN PURP 75V 200MA DO213AA", ComponentLink1Description="Manufacturer Link", ComponentLink1URL=http://www.digikey.com/product-detail/en/microsemi-corporation/1N4148UR-1/1N4148UR-1-ND/4377991, ComponentLink2Description=Datasheet, PackageDescription="DIODE GEN PURP 75V 200MA DO213AA", PackageReference=DO-213AA&SOD-80, PackageVersion=2017-1-12, PART.NO=1N4148UR-1, Published=2017-1-12, Publisher="Abbas Basereh"
D_BATT1 U2: Package=None, Availability=Unavailable, Price=None
  D_BATT1: MP=SS14
  U2: MP=M08-R
IC1: library part LM1117IMPX-ADJ_NOPB, "Integrated Circuit", Arrow Part Number=LM1117IMPX-ADJ/NOPB, Manufacturer_Name="Texas Instruments", Mouser Part Number=926-M1117IMPXADJNOPB, Arrow Price/Stock=https://www.arrow.com/en/products/lm1117impx-adjnopb/texas-instruments?region=europe, Datasheet Link=http://www.ti.com/general/docs/suppproductinfo.tsp?distId=10&gotoUrl=http%3A%2F%2Fwww.ti.com%2Flit%2Fgpn%2Flm1117, Height=1.8mm, Manufacturer_Part_Number=LM1117IMPX-ADJ/NOPB, Mouser Price/Stock=https://www.mouser.co.uk/ProductDetail/Texas-Instruments/LM1117IMPX-ADJ-NOPB?qs=X1J7HmVL2ZH7x9eSBiUHaQ%3D%3D
IC2: library part TP4056X, "Integrated Circuit", Manufacturer_Name="Nanjing Extension Microelectronics", Datasheet Link=https://datasheet.lcsc.com/szlcsc/Nanjing-Extension-Microelectronics-TP4056X_C191323.pdf, Height=1.75mm, Manufacturer_Part_Number=TP4056X
IC3: library part M24C02-RMN6P, "Integrated Circuit", Manufacturer_Name=STMicroelectronics, Mouser Part Number=511-M24C02-RMN6P, Arrow Part Number=M24C02-RMN6P, Arrow Price/Stock=https://www.arrow.com/en/products/m24c02-rmn6p/stmicroelectronics, Datasheet Link=http://www.st.com/st-web-ui/static/active/en/resource/technical/document/datasheet/DM00071904.pdf, Height=1.75mm, Manufacturer_Part_Number=M24C02-RMN6P, Mouser Price/Stock=https://www.mouser.co.uk/ProductDetail/STMicroelectronics/M24C02-RMN6P?qs=Au9%252BK7QVGzXd5M2vTlbyeA%3D%3D
J1: library part SIM5060-6-0-26-01-X_REVC, "SIM Card Connector, Hinged Type 6 Pin, SMT, 2.6mm Profile, Optional Locating Post", Package=None, Availability=Unavailable, MF="Global Connector Technology", MP=SIM5060-6-0-26-01-X, Price=None, SnapEDA_Link=https://www.snapeda.com/parts/SIM5060-6-0-26-01-X/Global%20Connector%20Technology/view-part/779299/?ref=snap
K1 K2: "Relay_SPDT POWER NEEDLE", Category=NT90TNC12CB, ComponentLink1Description=Datasheet, Designer="Abbas Basereh", Mounting Technology=Through-Hole, PackageDescription=31.7x26.7x28, PackageReference="RELAY NT90TNC12CB", Pin Count=0, Update Date=2017-3-4
L1: library part "Inductor 4.7µH SMD 3x3.2mm", "Inductor 4.7µH SMD 3x3.2mm", Operating Temperature="-40°C ~ 125°C", Tolerance=±20%, Package / Case="Inductor 4.7µH SMD 3x3.2mm", SCDType=source, Supplier 1=Digi-Key, Type="Ferrite Core"
LD1 LD2: library part "LED SMD"
LED1 LED2 LED3 LED4 LED5: library part 150080BS75000, "LED", Manufacturer_Name="Wurth Elektronik", Mouser Part Number=710-150080BS75000, Datasheet Link=https://katalog.we-online.com/led/datasheet/150080BS75000.pdf, Height=0.8mm, Manufacturer_Part_Number=150080BS75000, Mouser Price/Stock=https://www.mouser.co.uk/ProductDetail/Wurth-Elektronik/150080BS75000?qs=2kOmHSv6VfT2tBo3UPVqAQ%3D%3D
out1 out2 T1: library part CON_Phoenix_MSTBV_02, "2 Pitch: 5 mm Color: green Contact surface: Tin Assembly", Manufacturer="PHOENIX CONTACT", Max Current="12 A", Voltage="320 V", Category=Connector, ComponentLink1Description="Header, Nominal current: 12 A Rated voltage (III/2): 320 V Number of positions: 2 Pitch: 5 mm Color: green Contact surface: Tin Assembly: Soldering  DESIGNER:ABBAS BASEREH", ComponentLink2Description=Reference, Connector type="PCB Terminal Block", Designer="ABBAS BASEREH", Mounting Technology=Through-Hole, PART.NO=PHOENIX, Pin Count=2, Positions=2, Revision 1=2017-3-1, Status=Unreleased
P1 P2 P3: "Header, 3-Pin", LatestRevisionDate=17-Jul-2002, LatestRevisionNote="Re-released for DXP Platform.", Publisher="Altium Limited"
PROGRAM1: "Header, 4-Pin", LatestRevisionDate=17-Jul-2002, LatestRevisionNote="Re-released for DXP Platform.", Publisher="Altium Limited"
PS1: "Power Supply", Manufacturer_Name=Hi-Link, Datasheet Link=http://www.hlktech.net/product_detail.php?ProId=60, Height=18mm, Manufacturer_Part_Number=HLK-5M05
Q3: library part PNP, "PNP Bipolar Transistor", LatestRevisionDate=29-May-2009, LatestRevisionNote="IPC-7351 Footprint Added.", PackageDescription="3-Pin SOT-23 Package 0.95 mm Pitch, 2.4 mm Lead Span", PackageReference=SOT-23B, PackageVersion=Aug-1999, Published=8-Jun-2000, Publisher="Altium Limited"
Q4: "N-Channel 55V 110A (Tc) 200W (Tc) Through Hole TO-220AB", Package="TO-220 Infineon", Check_prices=https://www.snapeda.com/parts/IRF3205/Infineon+Technologies/view-part/?ref=eda, MF="Infineon Technologies", MP=IRF3205, SnapEDA_Link=https://www.snapeda.com/parts/IRF3205/Infineon+Technologies/view-part/?ref=snap
Q5: library part NPN, "NPN Bipolar Transistor", LatestRevisionDate=29-May-2009, LatestRevisionNote="IPC-7351 Footprint Added.", PackageDescription="3-Pin SOT-23 Package 0.95 mm Pitch, 2.4 mm Lead Span", PackageReference=SOT-23B, PackageVersion=Aug-1999, Published=8-Jun-2000, Publisher="Altium Limited"
R6 R17 R18 R25 R26 R27 R28 R29 R30 R31 R32 R36 R37 R39 R42 R43 R44 R45: library part Resistor, "Resistor", Power="1/8 W", Tolerance=5%
Remot1: "Header, 7-Pin", LatestRevisionDate=17-Jul-2002, LatestRevisionNote="Re-released for DXP Platform.", Publisher="Altium Limited"
S1: "Subminiator SPDT Switch", Company=E.P.I.L, Design date=2011/11/02
T2: "Transformer", Manufacturer_Name="Qingxian Zeming Langxi Electronic", Datasheet Link=https://www.alldatasheet.com/datasheet-pdf/pdf/1150711/ETC2/ZMCT103D.html, Height=19.2mm, Manufacturer_Part_Number=zmct103c
U3: "ARM® Cortex®-M3 STM32F1 Microcontroller IC 32-Bit 72MHz 64KB (64K x 8) FLASH 48-LQFP (7x7)", Package="LQFP-48 STMicroelectronics", Check_prices=https://www.snapeda.com/parts/STM32F103C8T6/STMicroelectronics/view-part/?ref=eda, MF=STMicroelectronics, MP=STM32F103C8T6, SnapEDA_Link=https://www.snapeda.com/parts/STM32F103C8T6/STMicroelectronics/view-part/?ref=snap
Y1: library part FOXSDLF/120-20, "CRYSTAL, 12MHz, 20PF, SMD; Frequency:12MHz; Frequency Tolerance:Â± 30ppm; Load Capacitance:20pF; Operating Temperature Range:-20Â°C to +70Â°C; Crystal Mounting Type:SMD; Crystal Case Type:HC-49S; No. of Pins:2; MSL:MSL 1 - Unlimited", Package="HC49SD Fox Electronics", Check_prices=https://www.snapeda.com/parts/FOXSDLF/120-20/Fox+Electronics/view-part/?ref=eda, MF="Fox Electronics", MP=FOXSDLF/120-20, SnapEDA_Link=https://www.snapeda.com/parts/FOXSDLF/120-20/Fox+Electronics/view-part/?ref=snap
J2 J3 J4 J5 J6 J7: LatestRevisionDate=17-Jul-2002, LatestRevisionNote="Re-released for DXP Platform.", Publisher="Altium Limited"

## Via types
v1: diameter 0.9, hole 0.5, Top Layer to Bottom Layer, 325 vias
v2: diameter 0.5, hole 0.3, Top Layer to Bottom Layer, 19 vias
v3: diameter 0.6, hole 0.3, Top Layer to Bottom Layer, 19 vias
v4: diameter 1.27, hole 0.711, Top Layer to Bottom Layer, 9 vias
v5: diameter 1.3, hole 1, Top Layer to Bottom Layer, 2 vias
v6: diameter 0.9, hole 0.5, Top Layer to Bottom Layer, tented both sides, 2 vias

## Nets (pads, with @x,y where several pads share a name; then routed paths per layer and width w, separated by ;. In a path a pad name is that pad's centre, name@x,y a point inside that pad or via, vN(x,y) a via of type N, cw(c..) or ccw(c..) an arc to the next point about the centre after c; other vN are vias at no path point)
3.3v: C1.2 C2.2 C3.2 C4.2 C5.1 C8.1 C25.1 IC1.2 IC1.4 IC3.8 R24.2 R34.2 R35.2 R36.2 R38.2 R41.2 U3.1 U3.9 U3.24 U3.36 U3.48 | length 146.2
  Top Layer w0.2: v6(98.298,64.008) 98.343,63.963 98.889,63.963
  Top Layer w0.3: v1(88.011,53.797) 88.189,53.797 88.189,55.913 U3.24@88.505,56.229 ; v1(91.084,66.98) 90.78,67.285 89.84,67.285 90.284,66.84 91.021,66.84 91.435,66.426 U3.9@91.435,63.159 ; U3.36@95.435,54.799 95.435,53.282 96.16,52.557 ; U3.1@95.485,63.271 96.865,63.271 ; C2.2@96.585,51.508 96.16,51.934 96.16,52.557 ; U3.48@96.865,61.729 96.865,63.271 ; 97.661,63.93 v6(98.298,64.008) ; v1@97.714,63.271 96.865,63.271 ; v1@97.747,52.974 97.33,52.557 96.16,52.557
  Top Layer w0.5: R24.2@85.293,72.038 85.47,72.215 85.47,73.895 v1@85.646,74.071
  Top Layer w0.65: R35.2@81.741,51.664 81.791,51.664 83.056,52.928 83.358,52.928 v1(83.718,53.289) ; R36.2@82.548,33.447 84.577,33.447 85.877,34.747 v1(85.877,37.694) ; 103.303,63.963 R38.2@103.607,64.266 ; R34.2@106.35,63.961 106.35,63.927 106.712,63.564 107.86,63.564 112.243,59.182 112.243,50.216 114.478,47.981 121.006,47.981 121.831,47.155 ; IC1.4@121.895,48.387 IC1.2@121.895,42.087 122.045,41.937 122.045,39.884 C8.1@122.203,39.726 C8.1@122.366,39.562
  Bottom Layer w0.3: 83.49,52.449 v1@84.024,52.983
  Bottom Layer w0.65: v1@85.725,73.891 85.725,68.428 87.02,67.132 90.449,67.132 ; v6(90.195,66.751) 90.576,67.132 90.886,67.132 v1@90.907,67.153 ; v1(124.638,47.371) 124.638,51.079 129.108,55.55 C5.1@133.48,55.55
  Bottom Layer w0.8: v1@83.541,53.34 86.068,53.34 ; v1(83.718,53.289) 83.718,52.841 83.636,52.758 82.679,52.758 81.61,51.689 81.61,41.961 v1(85.877,37.694) ; 98.541,54.472 v1@98.541,63.333 ; v1@98.541,63.42 v1@98.541,63.333 ; v1(98.654,63.221) v1@98.541,63.333
  Bottom Layer w1: v1@88.011,53.34 92.498,53.34 92.676,53.518 97.706,53.518 v1@97.841,53.383 ; v1(90.449,67.691) 90.449,67.526 v1@90.957,67.018 ; v1@90.907,67.153 v1@90.911,67.153 ; v1@91.038,67.153 91.084,67.107 v1(91.084,66.98) 91.453,66.98 91.626,67.153 95.085,67.153 v6@98.264,63.974 ; v6(98.298,64.008) 98.541,63.765 v1@98.541,63.42
  other v1: 119.253,45.949 123.139,45.974 124.638,45.974 120.345,46.152 123.165,47.371 119.278,47.396 120.472,47.422 98.908,52.934 88.036,52.984 97.841,53.035 96.774,53.188 84.785,53.365 102.235,53.619 102.108,54.585 98.069,63.221 85.646,73.835 85.621,74.521
5v: C6.1 C7.1 C14.2 C15.1 C17.1 C23.1 C24.1 cs1.2 D2.C D_BATT1.C IC1.3 IC2.4 IC2.8 L1.2 LED2.2 LED4.2 R1.2 R2.1 Remot1.2 U2.34 U2.35 | length 180.1
  Top Layer w0.3: v1@110.744,46.99 v1(110.795,47.041) ; v1(115.468,50.368) v1@115.675,50.368 ; R2.1@116.942,51.635 R2.1@116.942,51.685
  Top Layer w0.5: D_BATT1.C@108.414,46.99 v1@110.744,46.99 ; v1@115.675,50.368 R2.1@116.942,51.635
  Top Layer w0.65: cs1.2@63.398,39.319 63.398,42.266 ; R2.1@116.942,51.735 117.276,52.07 121.899,52.07 122.693,51.276 122.693,50.946 122.864,50.775 C6.1@123.245,50.775 ; 124.195,40.945 124.392,41.142 IC2.8@127.864,41.142 ; IC2.4@131.674,35.718 131.674,35.314 131.699,35.289 132.436,35.289 132.817,34.908 D2.C@132.817,32.043
  Top Layer w1: 62.619,37.084 61.671,37.084 60.27,35.682 60.27,32.096 C23.1@59.873,31.699 59.873,29.865 66.751,22.987 119.609,22.987 122.517,25.895 ; Remot1.2@119.99,31.09 119.99,28.423 122.517,25.895 ; C6.1@123.245,50.775 125.4,50.775 126.619,49.555 ; LED2.2@128.575,50.203 128.575,52.015 127.634,52.956 L1.2@127.634,54.458 ; C17.1@129.769,54.966 129.769,54.916 129.544,54.691 129.494,54.691 129.261,54.458 L1.2@127.634,54.458 ; LED4.2@130.708,49.794 126.858,49.794 126.619,49.555 ; C15.1@131.855,67.437 131.855,60.985 ; D2.C@132.556,32.055 132.246,32.055 130.9,30.709 124.195,30.709 ; C14.2@132.864,60.985 131.855,60.985 ; 122.517,25.895 124.195,27.573 124.195,30.709 ; 124.195,30.709 124.195,40.945 IC1.3@124.195,42.087 124.22,42.112 124.22,42.454 125.334,42.454 126.619,43.739 126.619,49.555 ; L1.2@127.634,54.458 127.634,55.602 L1.2@127.279,55.956 127.446,56.123 127.446,61.326 R1.2@127.613,61.493 127.663,61.493 128.171,60.985 131.855,60.985
  Bottom Layer w1: v1(110.795,47.041) 111.709,47.041 115.037,50.368 v1(115.468,50.368)
12v: C9.1 C10.1 C11.1 C12.2 C13.1 D3.2 D6.2 K1.3 K2.3 P1.1 P3.1 PS1.4 Q3.2 R3.2 R10.1 R19.1 R25.1 U1.1 | length 383.6
  Top Layer w0.3: P1.1@82.269,31.039 P1.1@82.32,31.09 ; R10.1@87.499,87.808 87.549,87.808 88.124,88.383 R10.1@88.124,88.433 ; R10.1@88.125,88.434 88.125,89.83 D3.2@89.125,90.83 ; 131.477,83.515 131.804,83.842
  Top Layer w0.65: D6.2@66.443,90.805 66.979,91.341 K2.3@66.979,99.303 ; C9.1@85.014,28.417 85.014,30.912 85.192,31.09 ; Q3.2@110.754,70.478 113.596,70.478 115.082,68.992 115.082,67.823 v4(115.443,67.462) ; R3.2@113.948,92.735 117.475,92.735 118.44,91.77 118.44,89.865 ; R25.1@114.229,89.84 118.415,89.84 118.44,89.865 ; v4@116.738,67.437 118.601,67.437 118.876,67.162 U1.1@118.876,66.976 ; PS1.4@118.069,87.325 PS1.4@118.434,87.325 118.44,87.331 118.44,89.865
  Top Layer w0.8: P1.1@82.32,31.09 85.192,31.09 P3.1@87.527,31.09 ; C11.1@130.556,83.515 131.477,83.515
  Top Layer w1: D6.2@66.443,90.805 67.093,90.155 67.093,89.464 67.238,89.319 R19.1@67.238,87.351 ; v1(87.732,21.006) v1(89.256,21.006) 89.256,20.836 89.568,20.523 123.419,20.523 132.207,29.312 138.252,29.312 139.497,30.556 139.497,68.809 131.804,76.502 131.804,83.842 128.321,87.325 PS1.4@118.434,87.325 118.434,87.19 118.055,86.811 C12.2@118.055,84.023 ; D3.2@89.125,90.83 91.999,90.83 95.428,94.259 95.428,99.218 K1.3@95.35,99.296
  Bottom Layer w0.65: P1.1@82.269,31.039 82.294,31.064 87.501,31.064 P3.1@87.527,31.09 87.628,30.988 87.628,21.084 v1@87.655,21.057
  Bottom Layer w0.8: v4(115.443,67.462) 115.443,70.383 123.622,78.562 C13.1@131.804,78.562
  Bottom Layer w1: K2.3@66.979,99.303 66.979,95.555 ; v1@87.655,21.057 v1@87.681,21.057 ; v1(87.732,21.006) v1@87.681,21.057 ; K1.3@95.35,99.296 95.35,96.9 94.005,95.555 66.979,95.555 ; 66.979,95.555 54.889,95.555 49.352,90.018 49.352,36.83 65.126,21.057 v1(84.303,21.057) 86.081,21.057 v1(86.131,21.006) 87.63,21.006 v1@87.681,21.057
  other v4: 116.662,67.513
CLK: PROGRAM1.3 U3.37 | length 8.6
  Top Layer w0.3: U3.37@96.865,56.229 98.33,56.229 101.016,53.543 101.016,51.213 101.564,50.666 PROGRAM1.3@101.564,50.438
current: C21.2 R13.2 U3.11 | length 61.7
  Top Layer w0.3: 89.967,64.846 90.435,64.378 U3.11@90.435,63.159
  Top Layer w0.4: 89.967,64.846 82.677,64.846 80.808,66.715 80.808,76.718 84.988,80.899 93.091,80.899 108.217,96.025 108.217,97.417 108.742,97.942 C21.2@108.763,97.942
  Top Layer w0.65: C21.2@108.763,97.942 108.775,97.955 111.029,97.955 R13.2@111.041,97.968
DIO: PROGRAM1.4 U3.34 | length 16.2
  Top Layer w0.3: U3.34@94.435,54.799 94.435,47.678 95.987,46.126 98.298,46.126 99.024,46.852 PROGRAM1.4@99.024,50.438